# Allegro board CPOL_2m.brd
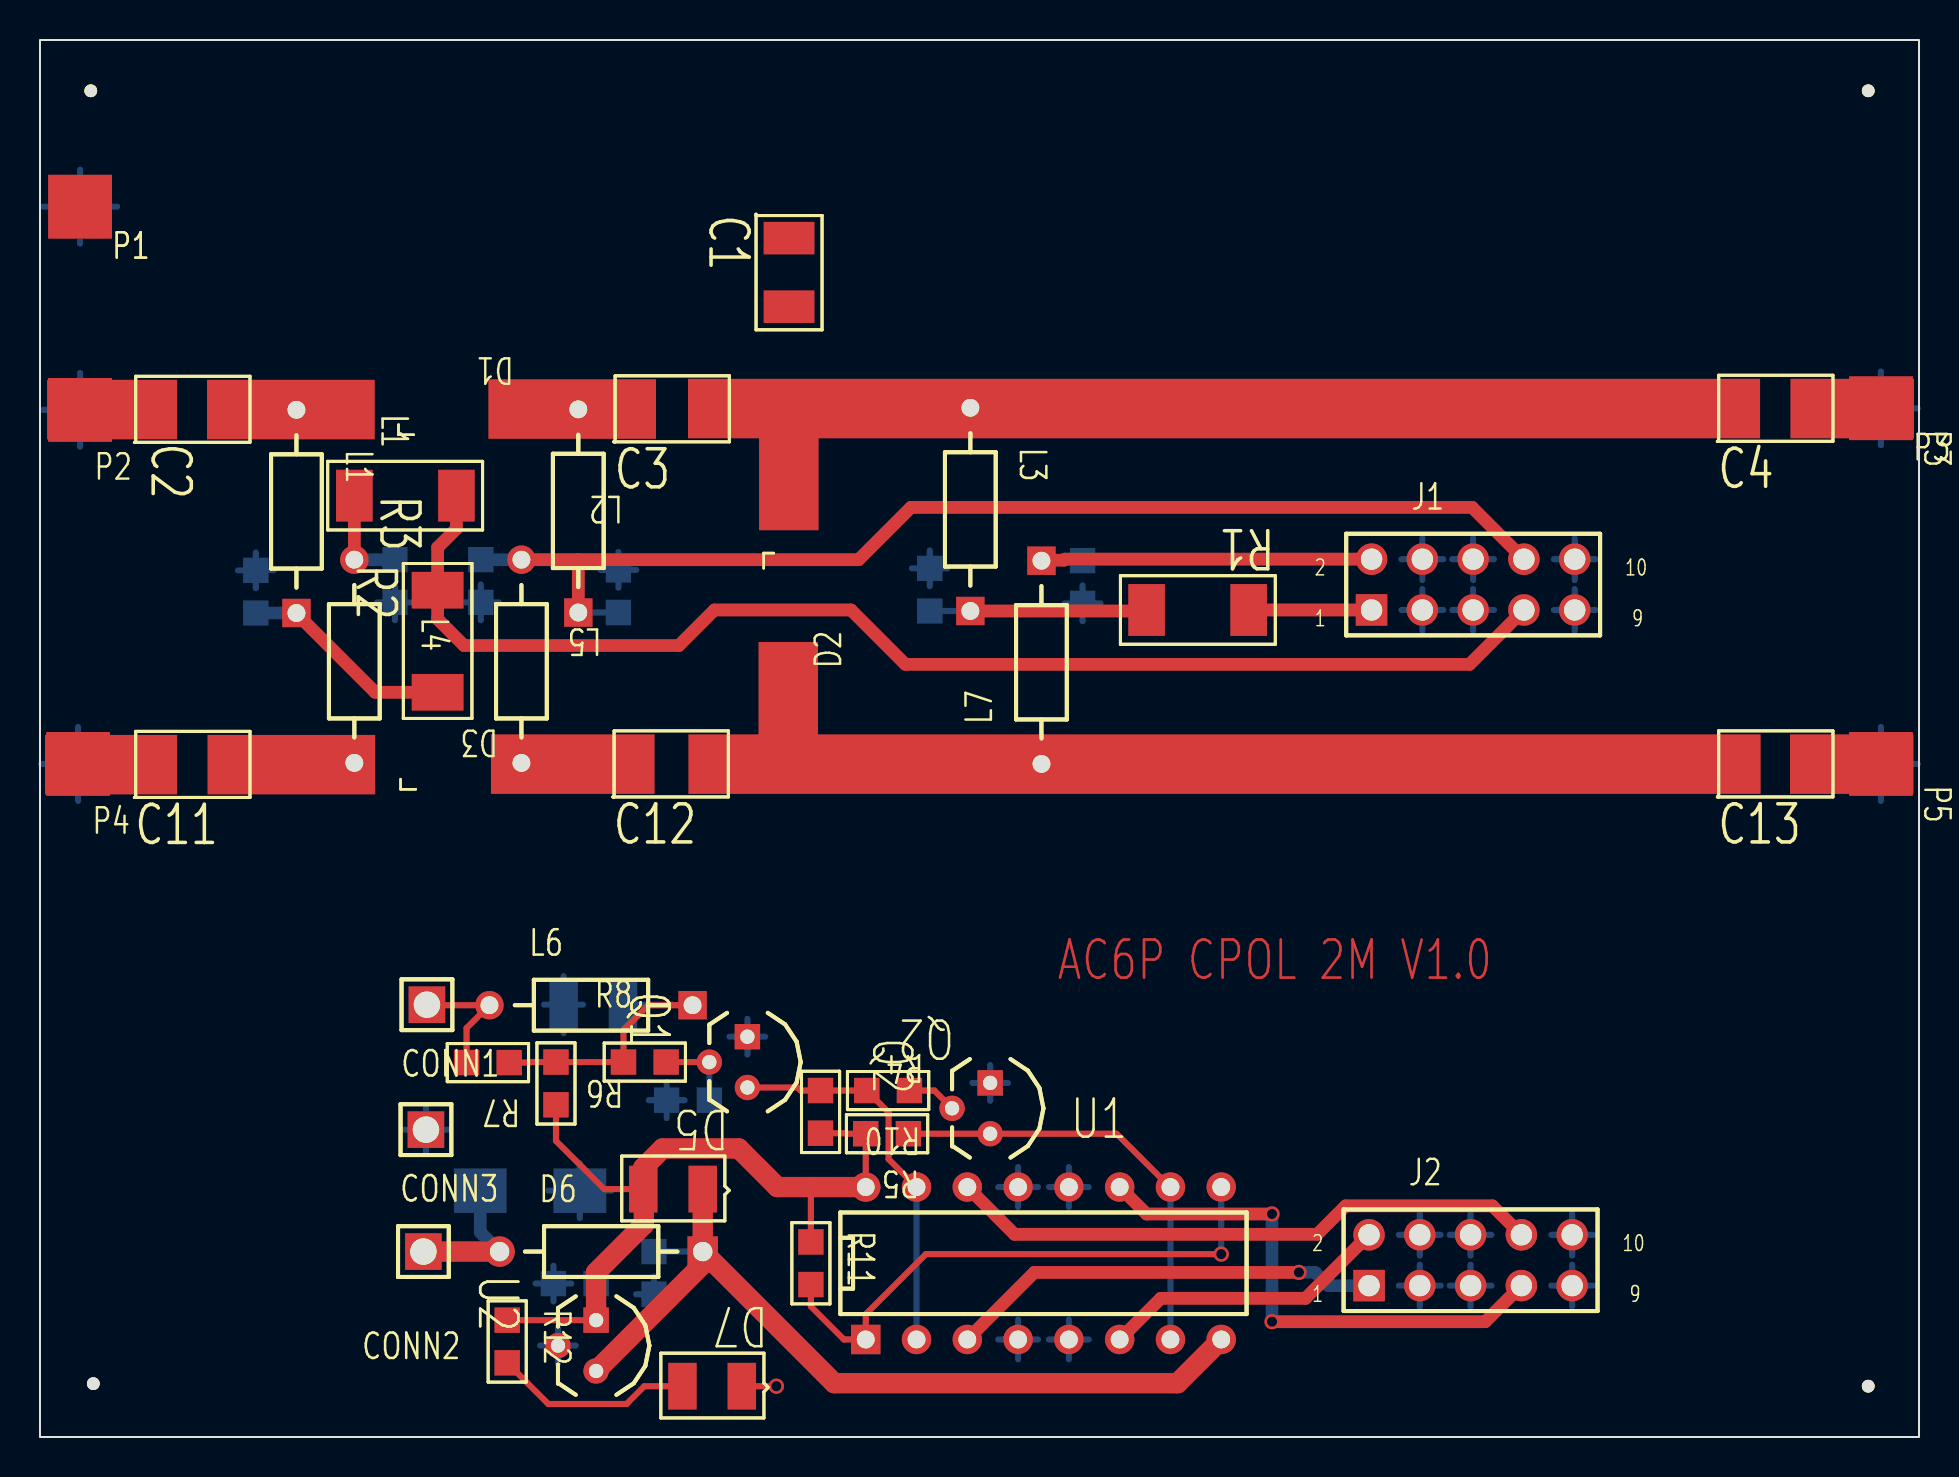
[diagram p0: board, top side]
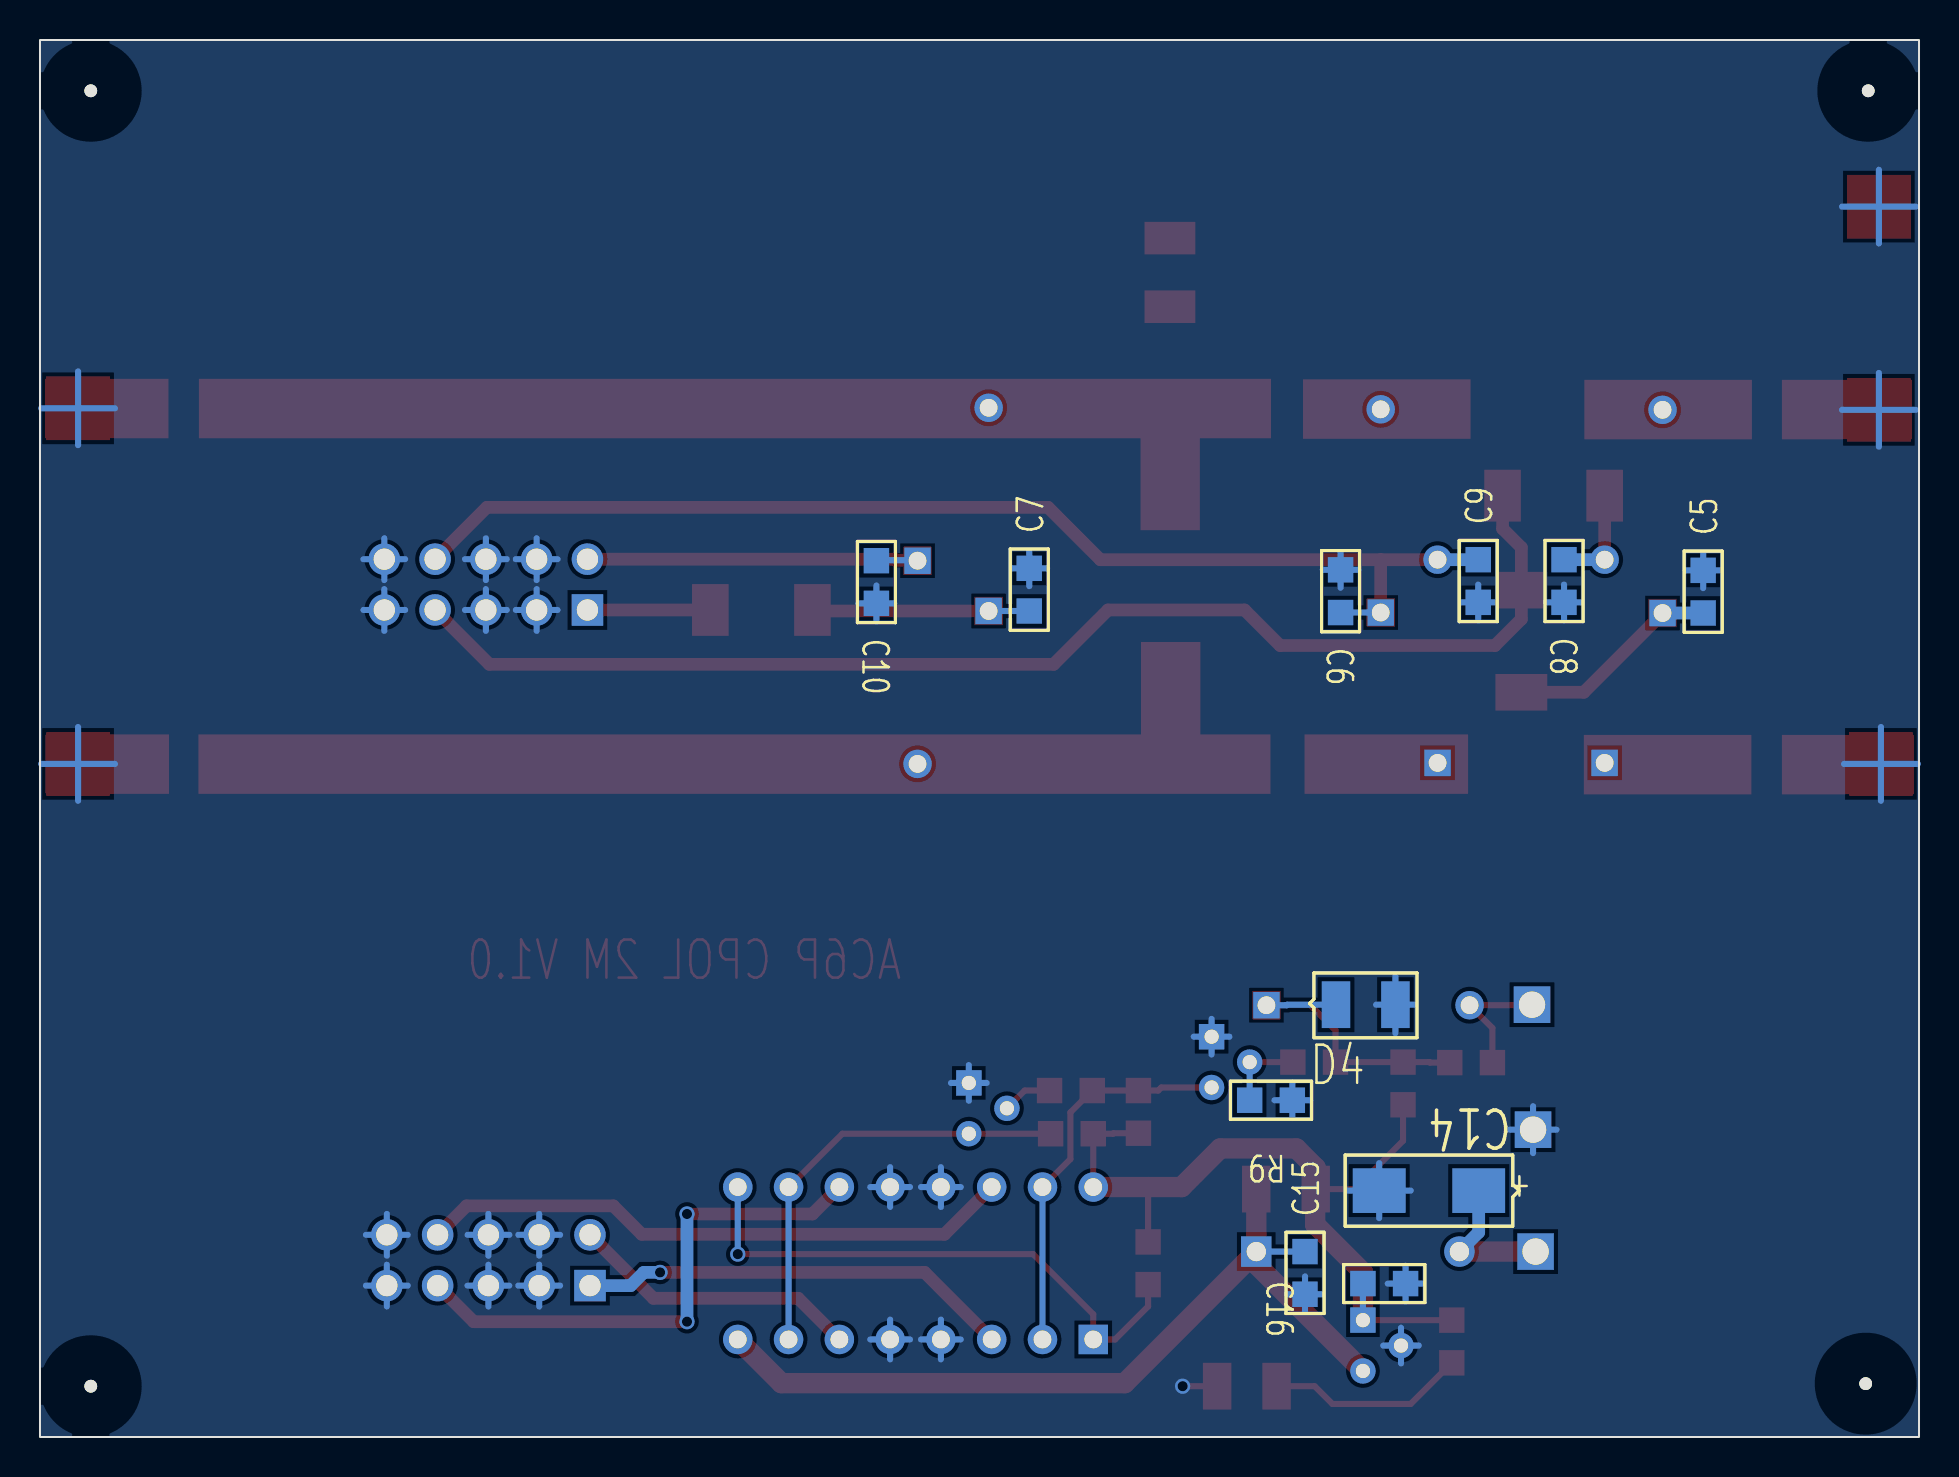
[diagram p1: board, bottom side, seen from below]

Outline 93.98 x 69.85 mm; copper layers: TOP, BOTTOM. Coordinates in mm from the lower left corner of the outline.
Outline path: rectangle 0,0 93.98,69.85

## Placement (name value [footprint] x y rotation side)
C1  1nF  [SMC1210]  37.47 59.94 270 top
C2  1nF  [SMC1210]  5.92 51.38 0 top
C3  1nF  [SMC1210]  29.9 51.41 0 top
C4  1nF  [SMC1210]  85.09 51.44 0 top
C5  1nF  [SMC0805]  10.79 41.2 90 bottom
C6  1nF  [SMC0805]  28.93 43.36 270 bottom
C7  10nF  [SMC0805]  44.5 41.3 90 bottom
C8  1nF  [SMC0805]  17.75 43.87 270 bottom
C9  1nF  [SMC0805]  22.05 41.73 90 bottom
C10  10nF  [SMC0805]  52.15 43.81 270 bottom
C11  1nF  [SMC1210]  5.92 33.63 0 top
C12  1nF  [SMC1210]  29.84 33.66 0 top
C13  1nF  [SMC1210]  85.09 33.66 0 top
C14  47uF / Tant  [EIAC_SMCT6032_12]  22.02 12.32 0 bottom
C15  100n  [SMC0805]  30.71 7.14 90 bottom
C16  1u  [SMC0805]  25.68 7.67 0 bottom
CONN1  TestPoint  [BCON_1X1V_SQ_52D]  19.35 21.62 0 top
CONN2  TestPoint  [BCON_1X1V_SQ_52D]  19.18 9.27 0 top
CONN3  TestPoint  [BCON_1X1V_SQ_52D]  19.3 15.37 0 top
D1  UM7504E  [UM750XE]  25.3 51.38 180 top
D2  UM7504E  [UM750XE]  37.47 36.83 90 top
D3  UM7504E  [UM750XE]  25.4 33.66 180 top
D4  1N4148  [SMSOD123]  26.19 21.62 180 bottom
D5  1N4148  [SMSOD123]  30.18 12.4 180 top
D6  1N5818  [DAX400_38D]  22.99 9.27 0 top
D7  GRN  [SMSOD123]  32.13 2.54 180 top
J1  2x10Header  [BCON_5X2V_100S_42D]  66.6 41.35 0 top
J2  2x10Header  [BCON_5X2V_100S_42D]  66.47 7.57 0 top
L1  2uH  [AX400_35D]  12.83 51.36 270 top
L2  2uH  [AX400_35D]  26.92 51.38 270 top
L3  2uH  [AX400_35D]  46.53 51.46 270 top
L4  2uH  [AX400_35D]  15.72 43.87 270 top
L5  2uH  [AX400_35D]  24.08 43.87 270 top
L6  2uH  [AX400_35D]  22.48 21.59 0 top
L7  2uH  [AX400_35D]  50.09 33.66 90 top
NOREF  -  [unnamed]  2.67 2.67 0 top
NOREF#2  -  [unnamed]  2.54 67.31 0 top
NOREF#3  -  [unnamed]  91.44 2.54 0 top
NOREF#4  -  [unnamed]  91.44 67.31 0 top
P1  TPADS  [USTRIP2COAX]  2.01 61.52 0 top
P2  TPADS  [USTRIP2COAX]  2.01 51.36 0 top
P3  TPADS  [USTRIP2COAX]  92.08 51.44 0 top
P4  TPADS  [USTRIP2COAX]  1.91 33.66 0 top
P5  TPADS  [USTRIP2COAX]  92.08 33.66 0 top
Q1  2N2222  [TO92R100]  35.38 18.75 270 top
Q2  2N2222  [TO92R100]  47.52 16.43 270 top
R1  240  [SMR2010]  60.45 41.35 180 top
R2  240  [SMR2010]  19.89 42.34 270 top
R3  240  [SMR2010]  15.72 47.07 0 top
R4  4.7k  [SMR0805]  39.04 17.32 270 top
R5  4.7k  [SMR0805]  43.43 15.16 180 top
R6  4.7k  [SMR0805]  25.81 18.75 270 top
R7  510  [SMR0805]  23.47 18.72 180 top
R8  22k  [SMR0805]  29.18 18.75 0 top
R9  10k  [SMR0805]  31.34 16.84 0 bottom
R10  2.2k  [SMR0805]  43.48 17.32 180 top
R11  4.7k  [SMR0805]  38.56 9.75 270 top
R12  330  [SMR0805]  23.37 5.84 270 top
U1  754410  [DIP100_16_W300_L800]  41.3 4.88 0 top
U2  78L05  [TO92R100]  27.81 4.57 270 top

## Library data of the parts
C1-C13 C15 C16 = C NP
C14 = C POL
CONN1-CONN3 = TestPoint
D1-D3 = Pin Diode_0
D4 D5 = 1N4148_0
D6 = DIODE SCHOTTKY
D7 = LED
J1 J2 = 2x10Header_2
L1 L2 L5 = INDUCTOR/SM_0
L3 L4 L6 L7 = INDUCTOR
P1-P5 = Coax Connector_0
Q1 Q2 = 2N2222
R1-R11 = R small
R12 = R_3
U1 = 754410
U2 = 78L05/TO92_1

## Footprints (pads in the part's own frame, mm; a bottom-side part is the same pattern mirrored in y, then rotated)
AX400_35D
  round 1.422 hole 0.889: 1(0,0)
  rect 1.422x1.422 hole 0.889: 2(10.16,0)
BCON_1X1V_SQ_52D
  rect 1.829x1.829 hole 1.321: 1(0,0)
BCON_5X2V_100S_42D
  rect 1.575x1.575 hole 1.067: 1(0,0)
  round 1.575 hole 1.067: 2(0,2.54) 3(2.54,0) 4(2.54,2.54) 5(5.08,0) 6(5.08,2.54) 7(7.62,0) 8(7.62,2.54) 9(10.16,0) 10(10.16,2.54)
DAX400_38D
  round 1.524 hole 0.965: 1(0,0)
  rect 1.524x1.524 hole 0.965: 2(10.16,0)
DIP100_16_W300_L800
  rect 1.473x1.473 hole 0.889: 1(0,0)
  round 1.473 hole 0.889: 2(2.54,0) 3(5.08,0) 4(7.62,0) 5(10.16,0) 6(12.7,0) 7(15.24,0) 8(17.78,0) 9(17.78,7.62) 10(15.24,7.62) 11(12.7,7.62) 12(10.16,7.62) 13(7.62,7.62) 14(5.08,7.62) 15(2.54,7.62) 16(0,7.62)
EIAC_SMCT6032_12
  rect 2.642x2.235 smd: 1(0,0) 2(4.978,0)
SMC0805
  rect 1.27x1.27 smd: 1(0,0) 2(2.134,0)
SMC1210
  rect 1.626x2.54 smd: 1(0,0) 2(3.429,0)
SMR0805
  rect 1.27x1.27 smd: 1(0,0) 2(2.134,0)
SMR2010
  rect 1.829x2.591 smd: 1(0,0) 2(5.105,0)
SMSOD123
  rect 1.422x2.337 smd: 1(0,0) 2(-2.972,0)
TO92R100
  rect 1.27x1.27 hole 0.711: 1(-1.27,0)
  round 1.27 hole 0.711: 2(0,-1.905) 3(1.27,0)
UM750XE
  rect 5.08x2.032 smd: 1(0,0) 2(11.43,0)
unnamed
  round 0.635 hole 3.175 unplated: (0,0)
USTRIP2COAX
  rect 3.175x3.175 smd: 1(0,0) 2(0,0)

## Nets
+5V: C16.2 D5.1(A) R4.2(B) R5.2(B) R6.2(B) R11.1(A) R12.1 U1.16(+VCC1) U2.1(OUT)
+12VDIST: C15.2 D5.2(K) D6.2(CATHODE) U1.8(+VCC2) U2.3(IN)
GND: C5.2 C6.1 C7.2 C8.2 C9.1 C10.2 C14.2 C15.1 C16.1 CONN3.1 D4.1(A) D7.2(CATHODE) J1.3(03) J1.4(04) J1.5(05) J1.6(06) J1.9(09) J1.10 J2.3(03) J2.4(04) J2.5(05) J2.6(06) J2.9(09) J2.10 P1.2(SHLD) P2.2(SHLD) P3.2(SHLD) P4.2(SHLD) P5.2(SHLD) Q1.1(EMITTER) Q2.1(EMITTER) R9.1(A) U1.4(GND#4) U1.5(GND#5) U1.12(GND#12) U1.13(GND#13) U2.2(GND)
NCPOL: CONN1.1 L6.1 R7.2(B)
N14617088: C2.2 D1.2 L1.1
N14621109: C1.2 C3.2 C4.1 D2.2 L3.1
N14621215: C12.2 C13.1 D2.1 L7.1
N14621579: C4.2 P3.1(CENTER 1)
N14621652: C13.2 P5.1(CENTER 1)
N14621878: C3.1 D1.1 L2.1
N14621944: C12.1 D3.1 L5.2
N14624447: C5.1 L1.2 R2.2(B)
N14624519: C11.2 D3.2 L4.2
N14633177: C6.2 C9.2 J1.8(08) L2.2 L5.1
N14633827: C8.1 L4.1 R3.1(A)
N14633928: C10.1 J1.2(02) L7.2
N14636349: R11.2(B) U1.1(ENA) U1.9(ENB)
N14637026: Q1.3(COLLECTOR) R4.1(A) R10.2(B) U1.2(1A) U1.15(2B)
N14637041: Q2.3(COLLECTOR) R5.1(A) U1.7(2A) U1.10(1B)
N14640486: D4.2(K) L6.2 R6.1(A) R7.1(A) R8.1(A)
N14644368: Q1.2(BASE) R8.2(B) R9.2(B)
N14646480: J1.7(07) R2.1(A) R3.2(B)
N14646496: C7.1 L3.2 R1.2(B)
N14650602: J1.1(01) R1.1(A)
N14656444: C14.1 CONN2.1 D6.1(ANODE)
N14662788: J2.1(01) U1.3(1A_O)
N14662985: J2.2(02) U1.6(2A_O)
N14663040: J2.7(07) U1.11(1B_O)
N14663134: J2.8(08) U1.14(2B_O)
N14674849: Q2.2(BASE) R10.1(A)
N146135040: C2.1 P2.1(CENTER 1)
N146135360: C11.1 P4.1(CENTER 1)
N146161120: C1.1 P1.1(CENTER 1)
N146520551: D7.1(ANODE) R12.2

## Via types
v1: diameter 0.762, hole 0.508, TOP to BOTTOM, 5 vias

## Routing (per net, layer and track width the routed paths; a pad name or vN(x,y) marks a point on that pad's centre or on a via; arc(x,y) is an arc through that point)
+5V: length 42.2
  TOP w0.305: D5.1 28.22,12.4 25.81,14.81 R6.2 ; R12.1 U2.1 ; 38.53,12.5 38.56,12.47 R11.1 ; R4.2 40.28,15.19 40.31,15.16 R5.2 U1.16
  TOP w1.016: 30.2,12.5 30.2,10.62 27.81,8.23 U2.1 ; U1.16 36.88,12.5 34.95,14.43 31.14,14.43 30.18,13.46 D5.1
  BOTTOM w0.305: 27.81,7.67 U2.1
+12VDIST: length 43.3
  TOP w1.016: U2.3 33.15,8.64 D6.2 ; D6.2 D5.2 ; D6.2 39.73,2.69 56.9,2.69 U1.8
  BOTTOM w0.305: 30.73,9.27 D6.2
GND: length 162.8
  TOP w0.305: D7.2 v1(36.83,2.54)
  BOTTOM w0.305: 35.38,19.12 Q1.1 ; Q1.1 36.27,20.02 ; Q1.1 35.38,20.91 ; Q1.1 34.49,20.02 ; 50.47,4.88 U1.5 ; U1.5 52.45,4.88 ; U1.5 51.46,5.87 ; U1.5 51.46,3.88 ; U1.4 49.91,4.88 ; U1.4 47.93,4.88 ; U1.4 48.92,3.88 ; U1.4 48.92,5.87 ; J1.3 69.14,42.4 ; J1.3 70.18,41.35 ; J1.3 68.09,41.35 ; J1.3 69.14,40.31 ; 68.09,43.89 J1.4 ; J1.4 69.14,42.85 ; J1.4 70.18,43.89 ; J1.4 69.14,44.94 ; C14.2 28.58,12.32 ; C14.2 27,10.94 ; C14.2 25.42,12.32 ; C14.2 27,13.69 ; 46.63,17.7 Q2.1 ; Q2.1 47.52,18.6 ; Q2.1 47.52,16.81 ; Q2.1 48.41,17.7 ; D4.1 26.19,23.04 ; D4.1 27.16,21.62 ; D4.1 26.19,20.19 ; D4.1 25.22,21.62 ; J1.5 71.68,42.4 ; J1.5 72.72,41.35 ; J1.5 71.68,40.31 ; J1.5 70.63,41.35 ; P5.2 93.92,33.66 ; P5.2 92.08,31.81 ; P5.2 92.08,35.5 ; P5.2 90.23,33.66 ; C10.2 52.15,42.57 ; C10.2 51.25,41.68 ; C10.2 53.04,41.68 ; C10.2 52.15,40.79 ; 0.16,61.52 P1.2 ; P1.2 2.01,59.67 ; P1.2 3.85,61.52 ; P1.2 2.01,63.36 ; 31.34,15.95 R9.1 ; R9.1 30.45,16.84 ; R9.1 31.34,17.73 ; R9.1 32.24,16.84 ; J2.3 69.01,8.61 ; J2.3 69.01,6.53 ; J2.3 70.06,7.57 ; J2.3 67.97,7.57 ; J1.6 72.72,43.89 ; J1.6 71.68,42.85 ; J1.6 70.63,43.89 ; J1.6 71.68,44.94 ; C7.2 44.5,44.33 ; C7.2 44.5,42.54 ; C7.2 43.61,43.43 ; C7.2 45.39,43.43 ; 21.16,41.73 C9.1 ; C9.1 22.05,40.84 ; C9.1 22.05,42.62 ; C9.1 22.94,41.73 ; C8.2 17.75,42.62 ; C8.2 16.86,41.73 ; C8.2 17.75,40.84 ; C8.2 18.65,41.73 ; 76.76,42.85 J1.10 ; J1.10 75.71,43.89 ; J1.10 77.8,43.89 ; J1.10 76.76,44.94 ; 50.47,12.5 U1.12 ; U1.12 51.46,13.49 ; U1.12 51.46,11.5 ; U1.12 52.45,12.5 ; CONN3.1 19.3,16.54 ; CONN3.1 20.47,15.37 ; CONN3.1 19.3,14.2 ; CONN3.1 18.13,15.37 ; C6.1 29.82,43.36 ; C6.1 28.93,44.25 ; C6.1 28.93,42.47 ; C6.1 28.04,43.36 ; J1.9 77.8,41.35 ; J1.9 76.76,40.31 ; J1.9 75.71,41.35 ; J1.9 76.76,42.4 ; 25.91,3.68 U2.2 ; U2.2 26.8,4.57 ; U2.2 25.91,5.46 ; U2.2 25.02,4.57 ; J2.5 72.6,7.57 ; J2.5 71.55,8.61 ; J2.5 71.55,6.53 ; J2.5 70.51,7.57 ; 90.23,51.44 P3.2 ; P3.2 92.08,53.28 ; P3.2 92.08,49.59 ; P3.2 93.92,51.44 ; 75.59,7.57 J2.9 ; J2.9 76.63,6.53 ; J2.9 77.68,7.57 ; J2.9 76.63,8.61 ; U1.13 49.91,12.5 ; U1.13 48.92,13.49 ; U1.13 47.93,12.5 ; U1.13 48.92,11.5 ; 0.16,51.36 P2.2 ; P2.2 3.85,51.36 ; P2.2 2.01,53.2 ; P2.2 2.01,49.51 ; 24.79,7.67 C16.1 ; C16.1 26.57,7.67 ; C16.1 25.68,8.56 ; C16.1 25.68,6.78 ; 30.71,6.25 C15.1 ; C15.1 31.6,7.14 ; C15.1 30.71,8.03 ; C15.1 29.82,7.14 ; J2.10 76.63,11.15 ; J2.10 76.63,9.07 ; J2.10 75.59,10.11 ; J2.10 77.68,10.11 ; J2.4 70.06,10.11 ; J2.4 69.01,11.15 ; J2.4 69.01,9.07 ; J2.4 67.97,10.11 ; 1.91,31.81 P4.2 ; P4.2 1.91,35.5 ; P4.2 3.75,33.66 ; P4.2 0.06,33.66 ; J2.6 71.55,11.15 ; J2.6 70.51,10.11 ; J2.6 72.6,10.11 ; J2.6 71.55,9.07 ; 10.79,42.44 C5.2 ; C5.2 11.69,43.33 ; C5.2 9.9,43.33 ; C5.2 10.79,44.22
NCPOL: length 6.4
  TOP w0.305: R7.2 21.34,20.45 L6.1 19.43,21.59
N14624447: length 10.8
  TOP w0.635: 12.8,41.2 16.76,37.24 R2.2
  BOTTOM w0.635: C5.1 L1.2
N14633177: length 59
  TOP w0.635: 26.92,43.87 40.94,43.87 43.56,46.48 71.63,46.48 J1.8 ; 26.92,43.87 L2.2 ; 26.92,43.87 L5.1
  BOTTOM w0.305: L2.2 C6.2
  BOTTOM w0.635: C9.2 L5.1
N14633827: length 5.2
  TOP w0.635: R3.1 L4.1
  BOTTOM w0.635: C8.1 L4.1
N14633928: length 18.5
  TOP w0.635: J1.2 51.26,43.89 51.21,43.84 50.14,43.84
  BOTTOM w0.305: 50.14,43.84 52.12,43.84 C10.1
N14636349: length 28.2
  TOP w0.305: R11.2 38.56,6.53 40.21,4.88 U1.1 41.3,6.14 44.31,9.14 v1(59.08,9.14)
  BOTTOM w0.305: v1(59.08,9.14) U1.9
N14637026: length 19.5
  TOP w0.305: U1.15 42.44,13.89 42.44,16.23 R10.2 R4.1 38.05,17.32 37.9,17.48 Q1.3
  BOTTOM w0.305: U1.15 U1.2
N14637041: length 21.8
  TOP w0.305: R5.1 Q2.3 53.85,15.16 56.54,12.47
  BOTTOM w0.305: U1.7 U1.10
N14640486: length 14.8
  TOP w0.305: R7.1 24.46,18.72 24.49,18.75 R6.1 R8.1 29.18,20.35 30.43,21.59 32.64,21.59
  BOTTOM w0.305: D4.2 31.6,21.62 31.62,21.59 32.64,21.59
N14644368: length 4.1
  TOP w0.305: Q1.2 R8.2
  BOTTOM w0.305: Q1.2 R9.2
N14646480: length 64.4
  TOP w0.635: R3.2 20.83,45.42 19.89,44.48 R2.1 19.89,40.89 21.21,39.57 31.95,39.57 33.73,41.35 40.56,41.35 43.28,38.63 71.5,38.63 J1.7
N14646496: length 10.9
  TOP w0.635: 55.45,41.3 L3.2
  BOTTOM w0.305: C7.1 L3.2
N14650602: length 6
  TOP w0.635: 60.55,41.35 J1.1
N14656444: length 7.3
  TOP w1.016: CONN2.1 D6.1
  BOTTOM w0.635: D6.1 22.02,10.24 C14.1
N14662788: length 21.8
  TOP w0.635: U1.3 49.73,8.23 v1(62.97,8.23)
  BOTTOM w0.635: J2.1 64.44,7.57 63.78,8.23 v1(62.97,8.23)
N14662985: length 14.6
  TOP w0.635: U1.6 56.06,6.93 63.3,6.93 J2.2
N14663040: length 26.8
  TOP w0.635: U1.11 55.35,11.15 v1(61.62,11.15) ; v1(61.62,5.77) 72.29,5.77 J2.7
  BOTTOM w0.635: v1(61.62,5.77) v1(61.62,11.15)
N14663134: length 29.9
  TOP w0.635: U1.14 48.74,10.13 63.88,10.13 65.3,11.56 72.64,11.56 J2.8
N14674849: length 2.5
  TOP w0.305: Q2.2 44.73,17.32 R10.1
N146520551: length 10
  TOP w0.305: R12.2 25.43,1.65 29.34,1.65 30.23,2.54 D7.1

## Copper pours and planes (outline as drawn; the poured copper is in the pictures)
GND on BOTTOM: 0,69.85 0,0 93.98,0 93.98,69.85
N14617088 on TOP (solid shape): 16.74,49.89 8.36,49.89 8.36,52.86 16.74,52.86
N14621109 on TOP (solid shape): 38.94,45.34 35.97,45.34 35.97,51.51 38.94,51.51
N14621109 on TOP (solid shape): 86.03,49.94 32.41,49.94 32.41,52.91 86.03,52.91
N14621215 on TOP (solid shape): 38.91,33.58 35.94,33.58 35.94,39.75 38.91,39.75
N14621215 on TOP (solid shape): 86.06,32.16 32.44,32.16 32.44,35.13 86.06,35.13
N14621579 on TOP (solid shape): 93.73,49.94 87.55,49.94 87.55,52.91 93.73,52.91
N14621652 on TOP (solid shape): 93.7,32.16 87.53,32.16 87.53,35.13 93.7,35.13
N14621878 on TOP (solid shape): 30.81,49.91 22.43,49.91 22.43,52.88 30.81,52.88
N14621944 on TOP (solid shape): 30.73,32.16 22.56,32.16 22.56,35.13 30.73,35.13
N14624519 on TOP (solid shape): 16.76,32.13 8.38,32.13 8.38,35.1 16.76,35.1
N146135040 on TOP (solid shape): 6.86,49.89 0.36,49.89 0.36,52.86 6.86,52.86
N146135360 on TOP (solid shape): 6.86,32.13 0.25,32.13 0.25,35.1 6.86,35.1

## Text on the board
TOP: AC6P CPOL 2M V1.0
